# Altium PCB PCB1.PcbDoc
Units mil, origin at the board's own origin, x right, y up, seen from the top; angles counter-clockwise.
Board outline 6000 x 4000 mil, 2 copper layers (Top Layer, Bottom Layer); 13 components, 43 nets, 132 pads, 23 vias.
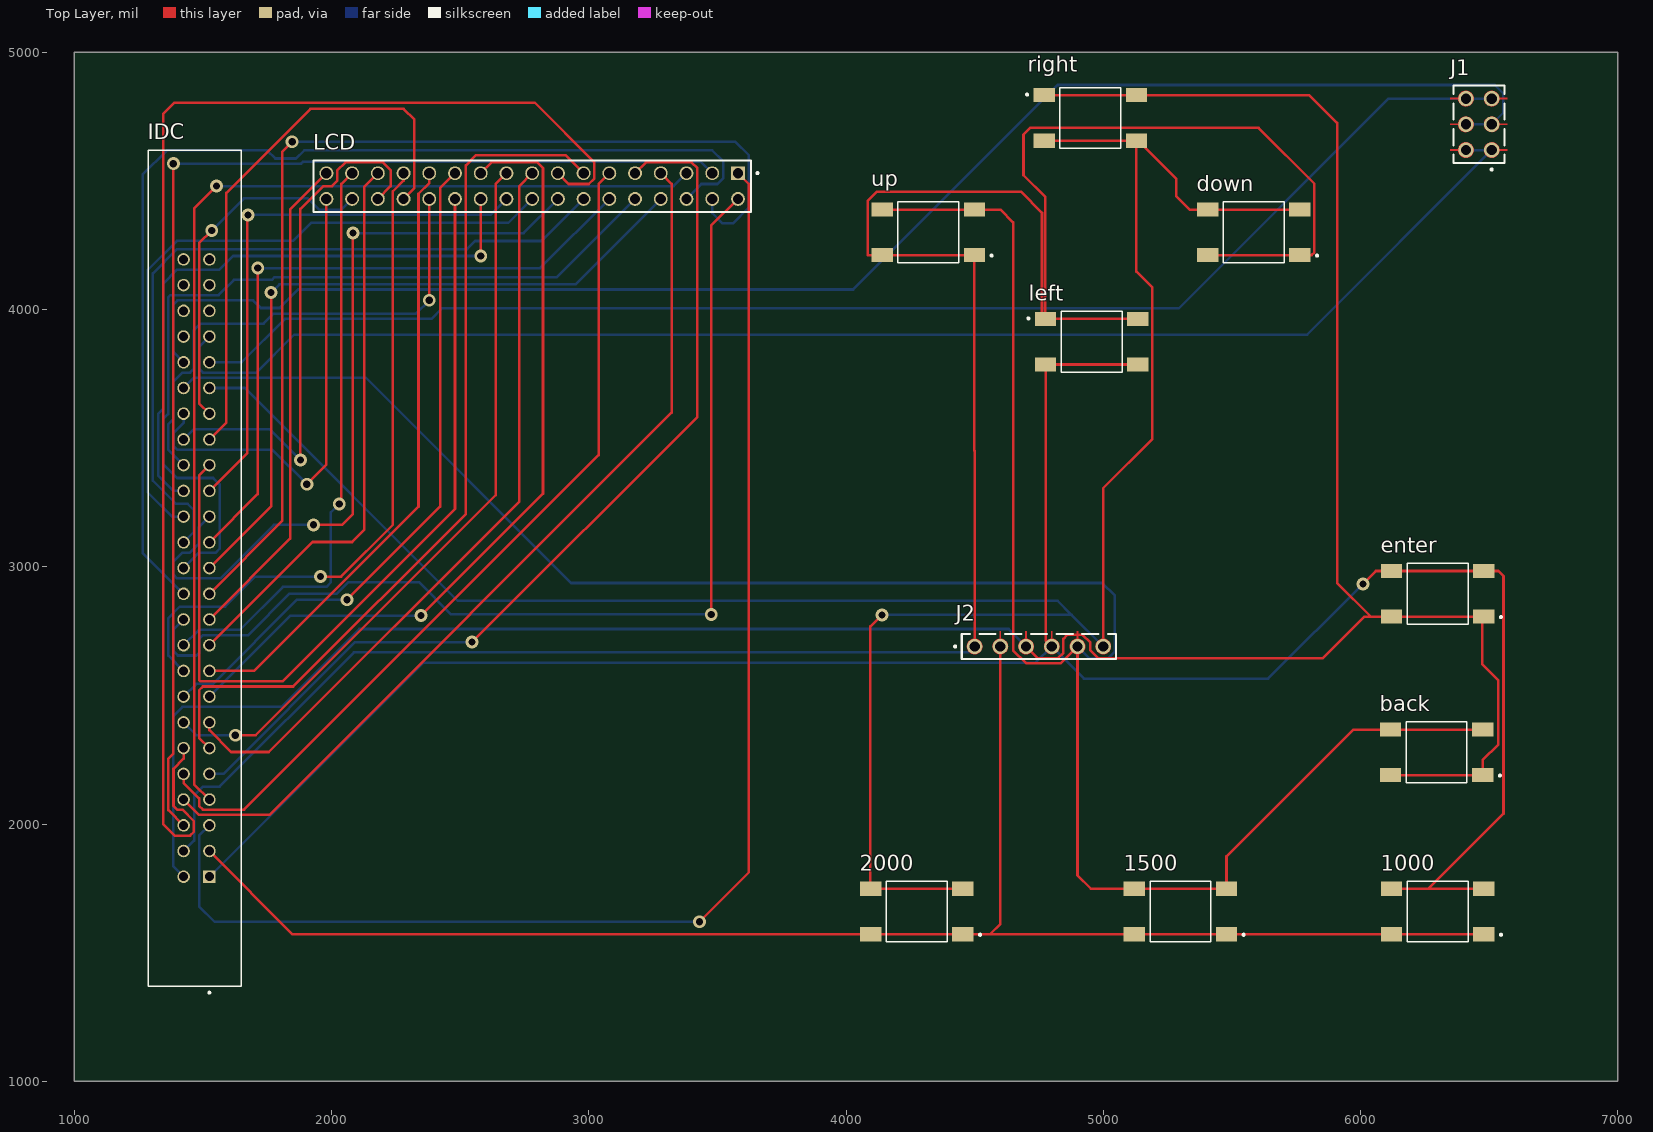
[diagram p0: Top Layer view]
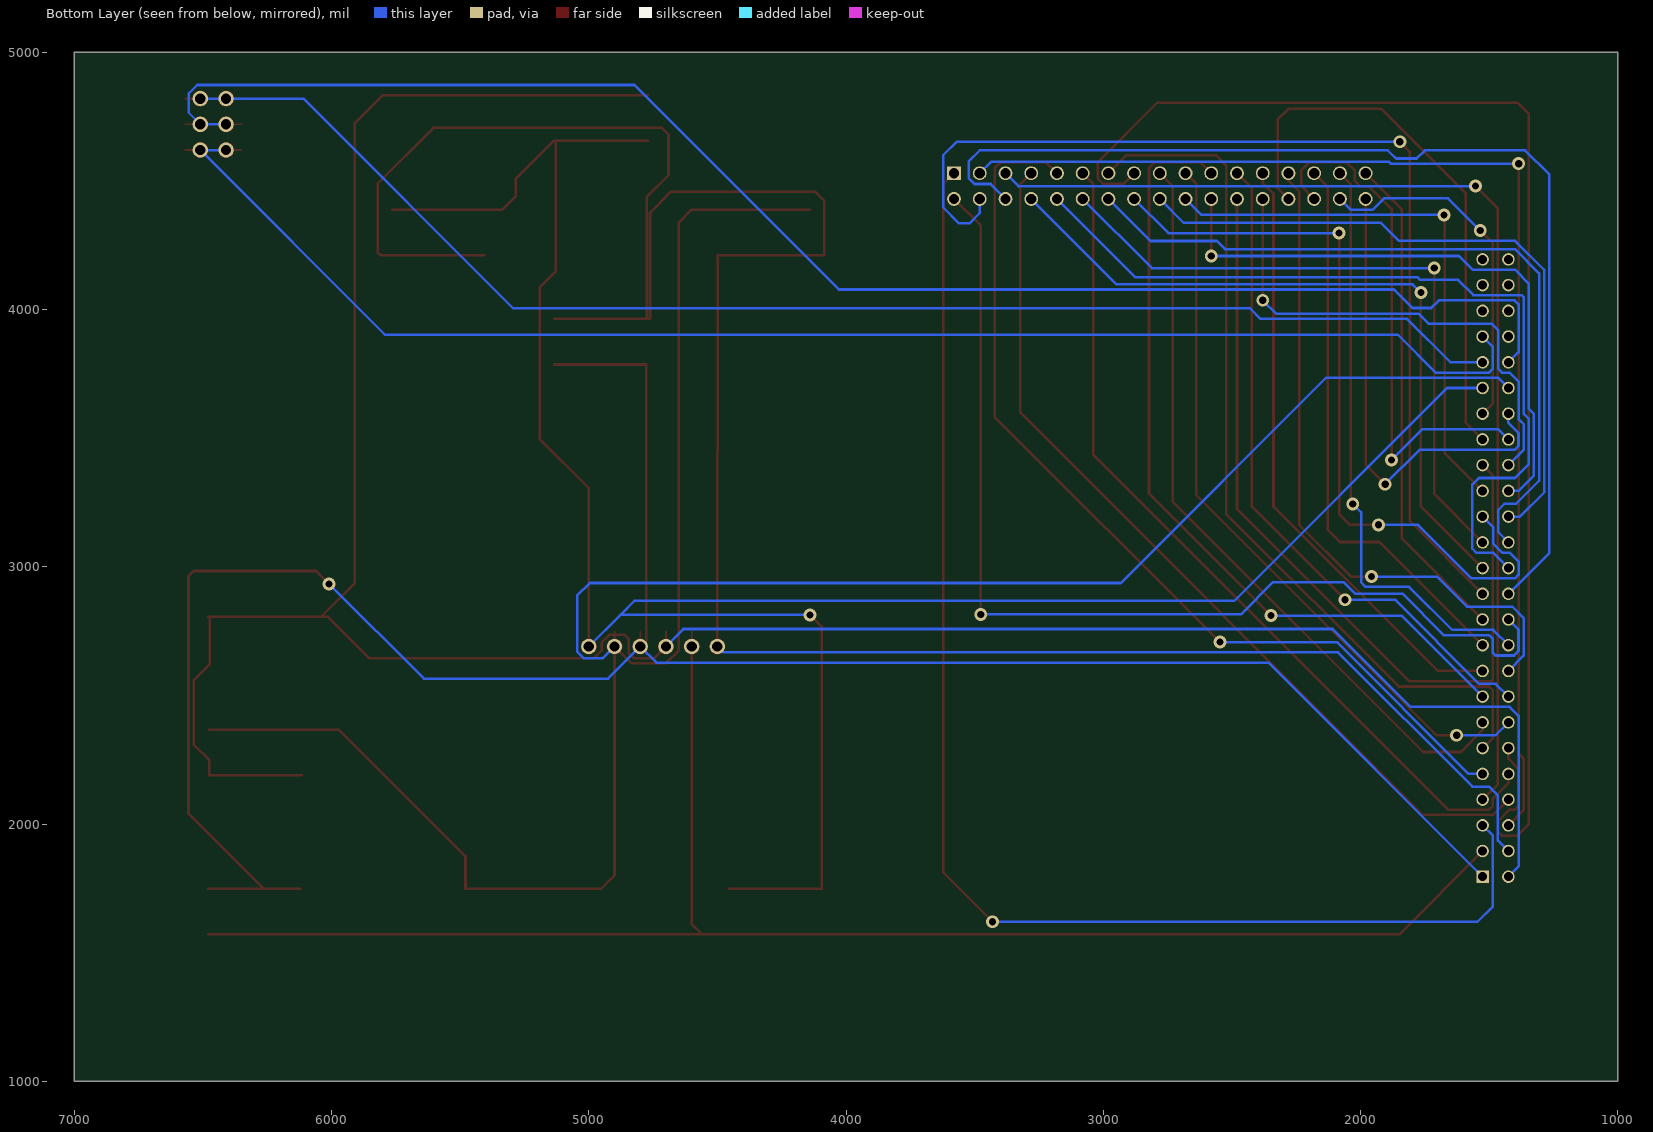
[diagram p1: Bottom Layer view, seen from below]
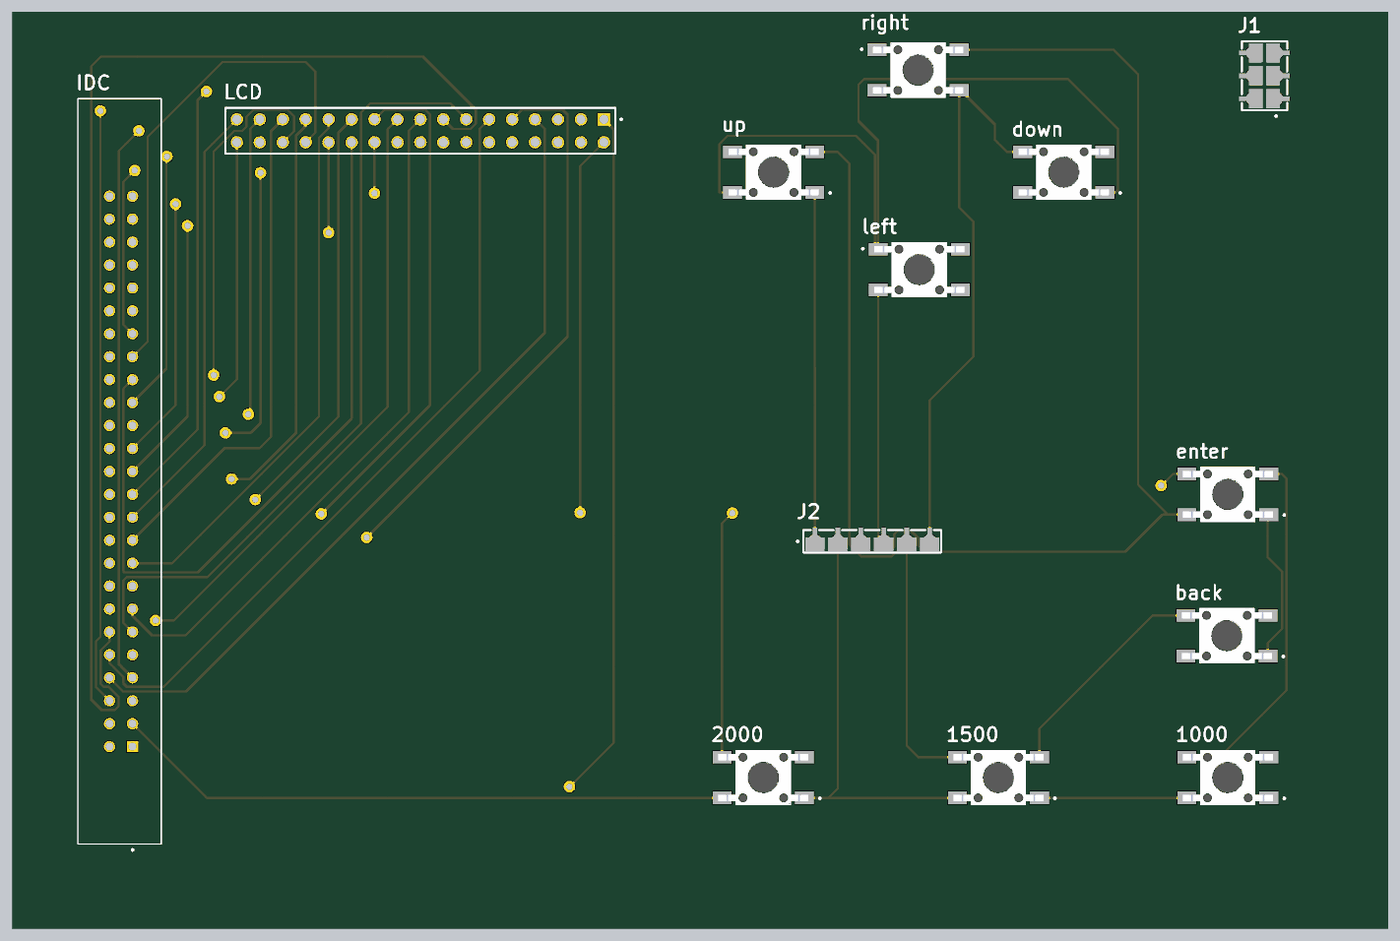
[diagram p2: 3D render of the assembled board from above, using the file's embedded part models]

## Layer stack, top to bottom
Top Solder: solder mask 0.4, Solder Resist, Dk 3.5
Top Layer: signal copper 1.4
Dielectric 1: dielectric 12.6, FR-4, Dk 4.8
Bottom Layer: signal copper 1.4
Bottom Solder: solder mask 0.4, Solder Resist, Dk 3.5

## Board outline
1000,1000 7000,1000 7000,5000 1000,5000

## Design rules (kind name [scope] priority, off if disabled: settings)
AssemblyTestPointUsage [All] p1: isadvanced=TRUE
AssemblyTestpoint [All] p1: isadvanced=TRUE testpointundercomponent=TRUE minsize=40 maxsize=100 preferedsize=60 minholesize=0 maxholesize=40 preferedholesize=32 testpointgrid=1 usegrid=TRUE gridtolerance=0.01 allowsidetop=TRUE allowsidebottom=TRUE
Clearance Clearance_1 [OnMid vs OnMid] p1: gap=10 ignorepadtopadclearanceinfootprint=FALSE sourcerule=36 cellrowname=All cellrowtype=0 cellcolname=All cellcoltype=0 innerlayers=TRUE
Clearance Clearance_2 [(ExistsOnLayer('Top Layer') Or ExistsOnLayer('Bottom Layer')) vs (ExistsOnLayer('Top Layer') Or ExistsOnLayer('Bottom Layer'))] p2: gap=10 ignorepadtopadclearanceinfootprint=FALSE sourcerule=36 cellrowname=All cellrowtype=0 cellcolname=All cellcoltype=0 outerlayers=TRUE
Clearance [All] p3: gap=10 ignorepadtopadclearanceinfootprint=FALSE ismatrix=TRUE
ComponentClearance [All] p1: isadvanced=TRUE gap=10 collisioncheckmode=3 verticalgap=10 showdistances=FALSE
FabricationTestPointUsage [All] p1: isadvanced=TRUE valid=0 allowmultiple=FALSE
FabricationTestpoint [All] p1: isadvanced=TRUE side=3 testpointundercomponent=TRUE minsize=40 maxsize=100 preferedsize=60 minholesize=0 maxholesize=40 preferedholesize=32 testpointgrid=1 allowsidetop=TRUE allowsidebottom=TRUE usegrid=TRUE gridtolerance=0.01
FanoutControl Fanout_BGA [IsBGA] p1: isadvanced=TRUE bgadir=Out bgaviamode=Centered fanoutstyle=Auto fanoutdirection=Alternating viagrid=1 // Fanout_BGA (Default Rule)
FanoutControl Fanout_LCC [IsLCC] p2: isadvanced=TRUE bgadir=Out bgaviamode=Centered fanoutstyle=Auto fanoutdirection=Alternating viagrid=1 // Fanout_LCC (Default Rule)
FanoutControl Fanout_SOIC [IsSOIC] p3: isadvanced=TRUE bgadir=Out bgaviamode=Centered fanoutstyle=Auto fanoutdirection=Alternating viagrid=1 // Fanout_SOIC (Default Rule)
FanoutControl Fanout_Small [(CompPinCount < 5)] p4: isadvanced=TRUE bgadir=Out bgaviamode=Centered fanoutstyle=Auto fanoutdirection=OutThenIn viagrid=1 // Fanout_Small (Default Rule)
FanoutControl Fanout_Default [All] p5: isadvanced=TRUE bgadir=Out bgaviamode=Centered fanoutstyle=Auto fanoutdirection=Alternating viagrid=1 // Fanout_Default (Default Rule)
Height [All] p1: isadvanced=TRUE minheight=0 maxheight=1000 prefheight=500
HoleSize [All] p1: isadvanced=TRUE absolutevalues=TRUE maxlimit=100 minlimit=1 maxpercent=80.000 minpercent=20.000
HoleToHoleClearance [All] p1: isadvanced=TRUE gap=10 allowstackedmicrovias=TRUE
LayerPairs [All] p1: isadvanced=TRUE enforce=TRUE
MinimumSolderMaskSliver [All] p1: isadvanced=TRUE minsoldermaskwidth=10
NetAntennae [All] p1: isadvanced=TRUE netantennaetolerance=0
PasteMaskExpansion [All] p1: isadvanced=TRUE expansion=0
PlaneClearance [All] p1: isadvanced=TRUE clearance=20
PlaneConnect [All] p1: isadvanced=TRUE planeconnectstyle=Relief reliefexpansion=20 reliefentries=4 reliefconductorwidth=10 reliefairgap=10
PolygonConnect [All] p1: connectstyle=Relief reliefconductorwidth=10 reliefentries=4 polygonreliefangle="90 Angle" airgapwidth=10
RoutingCorners [All] p1: isadvanced=TRUE cornerstyle=45-Degree minsetback=100 maxsetback=100
RoutingPriority [All] p1: isadvanced=TRUE routingpriority=0
RoutingVias [All] p1: holewidth=28 width=50 viastyle="Through Hole" minholewidth=28 minwidth=50 maxholewidth=28 maxwidth=50
ShortCircuit [All] p1: isadvanced=TRUE allowed=FALSE
SilkToSilkClearance [All] p1: isadvanced=TRUE silktosilkclearance=10
SilkToSolderMaskClearance [IsPad] p1: isadvanced=TRUE minsilkscreentomaskgap=10 clearancetoexposedcopper=TRUE
SolderMaskExpansion [All] p1: isadvanced=TRUE expansion=4 istentingtop=FALSE
UnRoutedNet [All] p1: isadvanced=TRUE
UnpouredPolygon [All] p1: isadvanced=TRUE
Width [All] p1: maxlimit=10 minlimit=10 preferedwidth=10
4 further rules are at their usual default settings.

## Classes and differential pairs
component class Sheet3: 1000 1500 2000 back down enter IDC J1 LCD left right up
component class Sheet2: zk
component class Sheet1: *

## Components (designator, comment, footprint, x,y, rotation, side; value= is the part's Value field where it differs from the comment)
1000 "4-1437565-9" SW_4-1437565-9 6300,1660 r180 top
1500 "4-1437565-9" SW_4-1437565-9 5300,1660 r180 top
2000 "4-1437565-9" SW_4-1437565-9 4275,1660 r180 top
back "4-1437565-9" SW_4-1437565-9 6295.87,2278.58 r180 top
down "4-1437565-9" SW_4-1437565-9 5585,4300 r180 top
enter "4-1437565-9" SW_4-1437565-9 6300,2895 r180 top
IDC "1-1761686-5" TE_1-1761686-5 1525,1795 r90 top
J1 "MTLW-103-07-L-D-320" SAMTEC_MTLW-103-07-L-D-320 6460,4720 r90 top (schematic designator J?)
J2 "MTLW-106-05-T-S-137" SAMTEC_MTLW-106-05-T-S-137 4750,2690 r180 top (schematic designator J?)
LCD "TSW-117-23-G-D" SAMTEC_TSW-117-23-G-D 3580,4530 r180 top
left "4-1437565-9" SW_4-1437565-9 4955,3875 r0 top
right "4-1437565-9" SW_4-1437565-9 4950,4745 r0 top
up "4-1437565-9" SW_4-1437565-9 4320,4300 r180 top

## Footprints (in the part's own frame and the unit in brackets; to place one, negate y for a bottom-side part, rotate by r counter-clockwise, add the part's x,y. Pads: shape width x height; smd on the part's side, far side on the other; paste and mask are expansions set on the pad)
SAMTEC_MTLW-103-07-L-D-320 [mm]
  round 1.52 hole 1.02: 01(-2.54,-1.27) 02(-2.54,1.27) 03(0,-1.27) 04(0,1.27) 05(2.54,-1.27) 06(2.54,1.27)
  Top Layer region: -2.461,-0.514 -2.382,-0.527 -2.305,-0.547 -2.231,-0.576 -2.16,-0.612 -2.093,-0.655 -2.031,-0.705 -1.975,-0.761 -1.925,-0.823 -1.882,-0.89 -1.846,-0.961 -1.817,-1.035 -1.797,-1.112 -1.784,-1.191 -1.78,-1.27 -1.781,-1.308 -1.784,-1.346 -1.788,-1.383 -1.795,-1.421 -1.803,-1.457 -1.813,-1.494 -1.825,-1.529 -1.839,-1.564 -1.854,-1.599 -1.871,-1.633 -1.89,-1.665 -1.91,-1.697 -1.932,-1.728 -1.955,-1.757 -1.98,-1.786 -2.006,-1.813 -2.034,-1.839 -2.063,-1.863 -2.092,-1.886 -2.123,-1.908 -2.155,-1.928 -2.188,-1.946 -2.222,-1.962 -2.257,-1.977 -2.292,-1.991 -2.328,-2.002 -2.364,-2.012 -2.401,-2.02 -2.438,-2.026 -2.475,-2.03 -2.475,-2.8 -2.605,-2.8 -2.605,-2.03 -2.642,-2.026 -2.679,-2.02 -2.716,-2.012 -2.752,-2.002 -2.788,-1.991 -2.823,-1.977 -2.858,-1.962 -2.892,-1.946 -2.925,-1.928 -2.957,-1.908 -2.988,-1.886 -3.017,-1.863 -3.046,-1.839 -3.074,-1.813 -3.1,-1.786 -3.125,-1.757 -3.148,-1.728 -3.17,-1.697 -3.19,-1.665 -3.209,-1.633 -3.226,-1.599 -3.241,-1.564 -3.255,-1.529 -3.267,-1.494 -3.277,-1.457 -3.285,-1.421 -3.292,-1.383 -3.296,-1.346 -3.299,-1.308 -3.3,-1.27 -3.296,-1.191 -3.283,-1.112 -3.263,-1.035 -3.234,-0.961 -3.198,-0.89 -3.155,-0.823 -3.105,-0.761 -3.049,-0.705 -2.987,-0.655 -2.92,-0.612 -2.849,-0.576 -2.775,-0.547 -2.698,-0.527 -2.619,-0.514 -2.54,-0.51
  Top Layer region: -2.475,2.03 -2.446,2.027 -2.412,2.022 -2.377,2.016 -2.343,2.008 -2.31,1.998 -2.277,1.987 -2.244,1.975 -2.212,1.961 -2.181,1.945 -2.15,1.928 -2.12,1.91 -2.091,1.89 -2.064,1.869 -2.037,1.847 -2.011,1.823 -1.986,1.799 -1.962,1.773 -1.94,1.746 -1.919,1.718 -1.899,1.69 -1.88,1.66 -1.863,1.63 -1.847,1.598 -1.833,1.566 -1.82,1.534 -1.809,1.501 -1.799,1.467 -1.791,1.433 -1.784,1.399 -1.78,1.37 -1.78,1.27 -1.781,1.23 -1.784,1.191 -1.789,1.151 -1.797,1.112 -1.806,1.073 -1.817,1.035 -1.83,0.998 -1.846,0.961 -1.863,0.925 -1.882,0.89 -1.903,0.856 -1.925,0.823 -1.949,0.792 -1.975,0.761 -2.003,0.733 -2.031,0.705 -2.062,0.679 -2.093,0.655 -2.126,0.633 -2.16,0.612 -2.195,0.593 -2.231,0.576 -2.268,0.56 -2.305,0.547 -2.343,0.536 -2.382,0.527 -2.421,0.519 -2.461,0.514 -2.5,0.511 -2.54,0.51 -2.58,0.511 -2.619,0.514 -2.659,0.519 -2.698,0.527 -2.737,0.536 -2.775,0.547 -2.812,0.56 -2.849,0.576 -2.885,0.593 -2.92,0.612 -2.954,0.633 -2.987,0.655 -3.018,0.679 -3.049,0.705 -3.077,0.733 -3.105,0.761 -3.131,0.792 -3.155,0.823 -3.177,0.856 -3.198,0.89 -3.217,0.925 -3.234,0.961 -3.25,0.998 -3.263,1.035 -3.274,1.073 -3.283,1.112 -3.291,1.151 -3.296,1.191 -3.299,1.23 -3.3,1.27 -3.3,1.37 -3.296,1.399 -3.289,1.433 -3.281,1.467 -3.271,1.501 -3.26,1.534 -3.247,1.566 -3.233,1.598 -3.217,1.63 -3.2,1.66 -3.181,1.69 -3.161,1.718 -3.14,1.746 -3.118,1.773 -3.094,1.799 -3.069,1.823 -3.043,1.847 -3.016,1.869 -2.989,1.89 -2.96,1.91 -2.93,1.928 -2.899,1.945 -2.868,1.961 -2.836,1.975 -2.803,1.987 -2.77,1.998 -2.737,2.008 -2.703,2.016 -2.668,2.022 -2.634,2.027 -2.605,2.03 -2.605,2.8 -2.475,2.8
  Top Layer region: 0.079,-0.514 0.158,-0.527 0.235,-0.547 0.309,-0.576 0.38,-0.612 0.447,-0.655 0.509,-0.705 0.565,-0.761 0.615,-0.823 0.658,-0.89 0.694,-0.961 0.723,-1.035 0.743,-1.112 0.756,-1.191 0.76,-1.27 0.759,-1.308 0.756,-1.346 0.752,-1.383 0.745,-1.421 0.737,-1.457 0.727,-1.494 0.715,-1.529 0.701,-1.564 0.686,-1.599 0.669,-1.633 0.65,-1.665 0.63,-1.697 0.608,-1.728 0.585,-1.757 0.56,-1.786 0.534,-1.813 0.506,-1.839 0.477,-1.863 0.448,-1.886 0.417,-1.908 0.385,-1.928 0.352,-1.946 0.318,-1.962 0.283,-1.977 0.248,-1.991 0.212,-2.002 0.176,-2.012 0.139,-2.02 0.102,-2.026 0.065,-2.03 0.065,-2.8 -0.065,-2.8 -0.065,-2.03 -0.102,-2.026 -0.139,-2.02 -0.176,-2.012 -0.212,-2.002 -0.248,-1.991 -0.283,-1.977 -0.318,-1.962 -0.352,-1.946 -0.385,-1.928 -0.417,-1.908 -0.448,-1.886 -0.477,-1.863 -0.506,-1.839 -0.534,-1.813 -0.56,-1.786 -0.585,-1.757 -0.608,-1.728 -0.63,-1.697 -0.65,-1.665 -0.669,-1.633 -0.686,-1.599 -0.701,-1.564 -0.715,-1.529 -0.727,-1.494 -0.737,-1.457 -0.745,-1.421 -0.752,-1.383 -0.756,-1.346 -0.759,-1.308 -0.76,-1.27 -0.756,-1.191 -0.743,-1.112 -0.723,-1.035 -0.694,-0.961 -0.658,-0.89 -0.615,-0.823 -0.565,-0.761 -0.509,-0.705 -0.447,-0.655 -0.38,-0.612 -0.309,-0.576 -0.235,-0.547 -0.158,-0.527 -0.079,-0.514 0,-0.51
  Top Layer region: 0.065,2.03 0.094,2.027 0.128,2.022 0.163,2.016 0.197,2.008 0.23,1.998 0.263,1.987 0.296,1.975 0.328,1.961 0.359,1.945 0.39,1.928 0.42,1.91 0.449,1.89 0.476,1.869 0.503,1.847 0.529,1.823 0.554,1.799 0.578,1.773 0.6,1.746 0.621,1.718 0.641,1.69 0.66,1.66 0.677,1.63 0.693,1.598 0.707,1.566 0.72,1.534 0.731,1.501 0.741,1.467 0.749,1.433 0.756,1.399 0.76,1.37 0.76,1.27 0.759,1.23 0.756,1.191 0.751,1.151 0.743,1.112 0.734,1.073 0.723,1.035 0.71,0.998 0.694,0.961 0.677,0.925 0.658,0.89 0.637,0.856 0.615,0.823 0.591,0.792 0.565,0.761 0.537,0.733 0.509,0.705 0.478,0.679 0.447,0.655 0.414,0.633 0.38,0.612 0.345,0.593 0.309,0.576 0.272,0.56 0.235,0.547 0.197,0.536 0.158,0.527 0.119,0.519 0.079,0.514 0.04,0.511 0,0.51 -0.04,0.511 -0.079,0.514 -0.119,0.519 -0.158,0.527 -0.197,0.536 -0.235,0.547 -0.272,0.56 -0.309,0.576 -0.345,0.593 -0.38,0.612 -0.414,0.633 -0.447,0.655 -0.478,0.679 -0.509,0.705 -0.537,0.733 -0.565,0.761 -0.591,0.792 -0.615,0.823 -0.637,0.856 -0.658,0.89 -0.677,0.925 -0.694,0.961 -0.71,0.998 -0.723,1.035 -0.734,1.073 -0.743,1.112 -0.751,1.151 -0.756,1.191 -0.759,1.23 -0.76,1.27 -0.76,1.37 -0.756,1.399 -0.749,1.433 -0.741,1.467 -0.731,1.501 -0.72,1.534 -0.707,1.566 -0.693,1.598 -0.677,1.63 -0.66,1.66 -0.641,1.69 -0.621,1.718 -0.6,1.746 -0.578,1.773 -0.554,1.799 -0.529,1.823 -0.503,1.847 -0.476,1.869 -0.449,1.89 -0.42,1.91 -0.39,1.928 -0.359,1.945 -0.328,1.961 -0.296,1.975 -0.263,1.987 -0.23,1.998 -0.197,2.008 -0.163,2.016 -0.128,2.022 -0.094,2.027 -0.065,2.03 -0.065,2.8 0.065,2.8
  Top Layer region: 2.619,-0.514 2.698,-0.527 2.775,-0.547 2.849,-0.576 2.92,-0.612 2.987,-0.655 3.049,-0.705 3.105,-0.761 3.155,-0.823 3.198,-0.89 3.234,-0.961 3.263,-1.035 3.283,-1.112 3.296,-1.191 3.3,-1.27 3.299,-1.308 3.296,-1.346 3.292,-1.383 3.285,-1.421 3.277,-1.457 3.267,-1.494 3.255,-1.529 3.241,-1.564 3.226,-1.599 3.209,-1.633 3.19,-1.665 3.17,-1.697 3.148,-1.728 3.125,-1.757 3.1,-1.786 3.074,-1.813 3.046,-1.839 3.017,-1.863 2.988,-1.886 2.957,-1.908 2.925,-1.928 2.892,-1.946 2.858,-1.962 2.823,-1.977 2.788,-1.991 2.752,-2.002 2.716,-2.012 2.679,-2.02 2.642,-2.026 2.605,-2.03 2.605,-2.8 2.475,-2.8 2.475,-2.03 2.438,-2.026 2.401,-2.02 2.364,-2.012 2.328,-2.002 2.292,-1.991 2.257,-1.977 2.222,-1.962 2.188,-1.946 2.155,-1.928 2.123,-1.908 2.092,-1.886 2.063,-1.863 2.034,-1.839 2.006,-1.813 1.98,-1.786 1.955,-1.757 1.932,-1.728 1.91,-1.697 1.89,-1.665 1.871,-1.633 1.854,-1.599 1.839,-1.564 1.825,-1.529 1.813,-1.494 1.803,-1.457 1.795,-1.421 1.788,-1.383 1.784,-1.346 1.781,-1.308 1.78,-1.27 1.784,-1.191 1.797,-1.112 1.817,-1.035 1.846,-0.961 1.882,-0.89 1.925,-0.823 1.975,-0.761 2.031,-0.705 2.093,-0.655 2.16,-0.612 2.231,-0.576 2.305,-0.547 2.382,-0.527 2.461,-0.514 2.54,-0.51
  Top Layer region: 2.605,2.03 2.634,2.027 2.668,2.022 2.703,2.016 2.737,2.008 2.77,1.998 2.803,1.987 2.836,1.975 2.868,1.961 2.899,1.945 2.93,1.928 2.96,1.91 2.989,1.89 3.016,1.869 3.043,1.847 3.069,1.823 3.094,1.799 3.118,1.773 3.14,1.746 3.161,1.718 3.181,1.69 3.2,1.66 3.217,1.63 3.233,1.598 3.247,1.566 3.26,1.534 3.271,1.501 3.281,1.467 3.289,1.433 3.296,1.399 3.3,1.37 3.3,1.27 3.299,1.23 3.296,1.191 3.291,1.151 3.283,1.112 3.274,1.073 3.263,1.035 3.25,0.998 3.234,0.961 3.217,0.925 3.198,0.89 3.177,0.856 3.155,0.823 3.131,0.792 3.105,0.761 3.077,0.733 3.049,0.705 3.018,0.679 2.987,0.655 2.954,0.633 2.92,0.612 2.885,0.593 2.849,0.576 2.812,0.56 2.775,0.547 2.737,0.536 2.698,0.527 2.659,0.519 2.619,0.514 2.58,0.511 2.54,0.51 2.5,0.511 2.461,0.514 2.421,0.519 2.382,0.527 2.343,0.536 2.305,0.547 2.268,0.56 2.231,0.576 2.195,0.593 2.16,0.612 2.126,0.633 2.093,0.655 2.062,0.679 2.031,0.705 2.003,0.733 1.975,0.761 1.949,0.792 1.925,0.823 1.903,0.856 1.882,0.89 1.863,0.925 1.846,0.961 1.83,0.998 1.817,1.035 1.806,1.073 1.797,1.112 1.789,1.151 1.784,1.191 1.781,1.23 1.78,1.27 1.78,1.37 1.784,1.399 1.791,1.433 1.799,1.467 1.809,1.501 1.82,1.534 1.833,1.566 1.847,1.598 1.863,1.63 1.88,1.66 1.899,1.69 1.919,1.718 1.94,1.746 1.962,1.773 1.986,1.799 2.011,1.823 2.037,1.847 2.064,1.869 2.091,1.89 2.12,1.91 2.15,1.928 2.181,1.945 2.212,1.961 2.244,1.975 2.277,1.987 2.31,1.998 2.343,2.008 2.377,2.016 2.412,2.022 2.446,2.027 2.475,2.03 2.475,2.8 2.605,2.8
  silkscreen extent -4.56,-2.52 3.81,2.52
SAMTEC_MTLW-106-05-T-S-137 [mm]
  round 1.52 hole 1.02: 01(6.35,0) 02(3.81,0) 03(1.27,0) 04(-1.27,0) 05(-3.81,0) 06(-6.35,0)
  Top Layer region: 6.429,0.756 6.508,0.743 6.585,0.723 6.659,0.694 6.73,0.658 6.797,0.615 6.859,0.565 6.915,0.509 6.965,0.447 7.008,0.38 7.044,0.309 7.073,0.235 7.093,0.158 7.106,0.079 7.11,0 7.109,-0.038 7.106,-0.076 7.102,-0.113 7.095,-0.151 7.087,-0.187 7.077,-0.224 7.065,-0.259 7.051,-0.294 7.036,-0.329 7.019,-0.363 7,-0.395 6.98,-0.427 6.958,-0.458 6.935,-0.487 6.91,-0.516 6.884,-0.543 6.856,-0.569 6.827,-0.593 6.798,-0.616 6.767,-0.638 6.735,-0.658 6.702,-0.676 6.668,-0.692 6.633,-0.707 6.598,-0.721 6.562,-0.732 6.526,-0.742 6.489,-0.75 6.452,-0.756 6.415,-0.76 6.415,-1.53 6.285,-1.53 6.285,-0.76 6.248,-0.756 6.211,-0.75 6.174,-0.742 6.138,-0.732 6.102,-0.721 6.067,-0.707 6.032,-0.692 5.998,-0.676 5.965,-0.658 5.933,-0.638 5.902,-0.616 5.873,-0.593 5.844,-0.569 5.816,-0.543 5.79,-0.516 5.765,-0.487 5.742,-0.458 5.72,-0.427 5.7,-0.395 5.681,-0.363 5.664,-0.329 5.649,-0.294 5.635,-0.259 5.623,-0.224 5.613,-0.187 5.605,-0.151 5.598,-0.113 5.594,-0.076 5.591,-0.038 5.59,0 5.594,0.079 5.607,0.158 5.627,0.235 5.656,0.309 5.692,0.38 5.735,0.447 5.785,0.509 5.841,0.565 5.903,0.615 5.97,0.658 6.041,0.694 6.115,0.723 6.192,0.743 6.271,0.756 6.35,0.76
  Top Layer region: 3.889,0.756 3.968,0.743 4.045,0.723 4.119,0.694 4.19,0.658 4.257,0.615 4.319,0.565 4.375,0.509 4.425,0.447 4.468,0.38 4.504,0.309 4.533,0.235 4.553,0.158 4.566,0.079 4.57,0 4.569,-0.038 4.566,-0.076 4.562,-0.113 4.555,-0.151 4.547,-0.187 4.537,-0.224 4.525,-0.259 4.511,-0.294 4.496,-0.329 4.479,-0.363 4.46,-0.395 4.44,-0.427 4.418,-0.458 4.395,-0.487 4.37,-0.516 4.344,-0.543 4.316,-0.569 4.287,-0.593 4.258,-0.616 4.227,-0.638 4.195,-0.658 4.162,-0.676 4.128,-0.692 4.093,-0.707 4.058,-0.721 4.022,-0.732 3.986,-0.742 3.949,-0.75 3.912,-0.756 3.875,-0.76 3.875,-1.53 3.745,-1.53 3.745,-0.76 3.708,-0.756 3.671,-0.75 3.634,-0.742 3.598,-0.732 3.562,-0.721 3.527,-0.707 3.492,-0.692 3.458,-0.676 3.425,-0.658 3.393,-0.638 3.362,-0.616 3.333,-0.593 3.304,-0.569 3.276,-0.543 3.25,-0.516 3.225,-0.487 3.202,-0.458 3.18,-0.427 3.16,-0.395 3.141,-0.363 3.124,-0.329 3.109,-0.294 3.095,-0.259 3.083,-0.224 3.073,-0.187 3.065,-0.151 3.058,-0.113 3.054,-0.076 3.051,-0.038 3.05,0 3.054,0.079 3.067,0.158 3.087,0.235 3.116,0.309 3.152,0.38 3.195,0.447 3.245,0.509 3.301,0.565 3.363,0.615 3.43,0.658 3.501,0.694 3.575,0.723 3.652,0.743 3.731,0.756 3.81,0.76
  Top Layer region: 1.349,0.756 1.428,0.743 1.505,0.723 1.579,0.694 1.65,0.658 1.717,0.615 1.779,0.565 1.835,0.509 1.885,0.447 1.928,0.38 1.964,0.309 1.993,0.235 2.013,0.158 2.026,0.079 2.03,0 2.029,-0.038 2.026,-0.076 2.022,-0.113 2.015,-0.151 2.007,-0.187 1.997,-0.224 1.985,-0.259 1.971,-0.294 1.956,-0.329 1.939,-0.363 1.92,-0.395 1.9,-0.427 1.878,-0.458 1.855,-0.487 1.83,-0.516 1.804,-0.543 1.776,-0.569 1.747,-0.593 1.718,-0.616 1.687,-0.638 1.655,-0.658 1.622,-0.676 1.588,-0.692 1.553,-0.707 1.518,-0.721 1.482,-0.732 1.446,-0.742 1.409,-0.75 1.372,-0.756 1.335,-0.76 1.335,-1.53 1.205,-1.53 1.205,-0.76 1.168,-0.756 1.131,-0.75 1.094,-0.742 1.058,-0.732 1.022,-0.721 0.987,-0.707 0.952,-0.692 0.918,-0.676 0.885,-0.658 0.853,-0.638 0.822,-0.616 0.793,-0.593 0.764,-0.569 0.736,-0.543 0.71,-0.516 0.685,-0.487 0.662,-0.458 0.64,-0.427 0.62,-0.395 0.601,-0.363 0.584,-0.329 0.569,-0.294 0.555,-0.259 0.543,-0.224 0.533,-0.187 0.525,-0.151 0.518,-0.113 0.514,-0.076 0.511,-0.038 0.51,0 0.514,0.079 0.527,0.158 0.547,0.235 0.576,0.309 0.612,0.38 0.655,0.447 0.705,0.509 0.761,0.565 0.823,0.615 0.89,0.658 0.961,0.694 1.035,0.723 1.112,0.743 1.191,0.756 1.27,0.76
  Top Layer region: -1.191,0.756 -1.112,0.743 -1.035,0.723 -0.961,0.694 -0.89,0.658 -0.823,0.615 -0.761,0.565 -0.705,0.509 -0.655,0.447 -0.612,0.38 -0.576,0.309 -0.547,0.235 -0.527,0.158 -0.514,0.079 -0.51,0 -0.511,-0.038 -0.514,-0.076 -0.518,-0.113 -0.525,-0.151 -0.533,-0.187 -0.543,-0.224 -0.555,-0.259 -0.569,-0.294 -0.584,-0.329 -0.601,-0.363 -0.62,-0.395 -0.64,-0.427 -0.662,-0.458 -0.685,-0.487 -0.71,-0.516 -0.736,-0.543 -0.764,-0.569 -0.793,-0.593 -0.822,-0.616 -0.853,-0.638 -0.885,-0.658 -0.918,-0.676 -0.952,-0.692 -0.987,-0.707 -1.022,-0.721 -1.058,-0.732 -1.094,-0.742 -1.131,-0.75 -1.168,-0.756 -1.205,-0.76 -1.205,-1.53 -1.335,-1.53 -1.335,-0.76 -1.372,-0.756 -1.409,-0.75 -1.446,-0.742 -1.482,-0.732 -1.518,-0.721 -1.553,-0.707 -1.588,-0.692 -1.622,-0.676 -1.655,-0.658 -1.687,-0.638 -1.718,-0.616 -1.747,-0.593 -1.776,-0.569 -1.804,-0.543 -1.83,-0.516 -1.855,-0.487 -1.878,-0.458 -1.9,-0.427 -1.92,-0.395 -1.939,-0.363 -1.956,-0.329 -1.971,-0.294 -1.985,-0.259 -1.997,-0.224 -2.007,-0.187 -2.015,-0.151 -2.022,-0.113 -2.026,-0.076 -2.029,-0.038 -2.03,0 -2.026,0.079 -2.013,0.158 -1.993,0.235 -1.964,0.309 -1.928,0.38 -1.885,0.447 -1.835,0.509 -1.779,0.565 -1.717,0.615 -1.65,0.658 -1.579,0.694 -1.505,0.723 -1.428,0.743 -1.349,0.756 -1.27,0.76
  Top Layer region: -3.731,0.756 -3.652,0.743 -3.575,0.723 -3.501,0.694 -3.43,0.658 -3.363,0.615 -3.301,0.565 -3.245,0.509 -3.195,0.447 -3.152,0.38 -3.116,0.309 -3.087,0.235 -3.067,0.158 -3.054,0.079 -3.05,0 -3.051,-0.038 -3.054,-0.076 -3.058,-0.113 -3.065,-0.151 -3.073,-0.187 -3.083,-0.224 -3.095,-0.259 -3.109,-0.294 -3.124,-0.329 -3.141,-0.363 -3.16,-0.395 -3.18,-0.427 -3.202,-0.458 -3.225,-0.487 -3.25,-0.516 -3.276,-0.543 -3.304,-0.569 -3.333,-0.593 -3.362,-0.616 -3.393,-0.638 -3.425,-0.658 -3.458,-0.676 -3.492,-0.692 -3.527,-0.707 -3.562,-0.721 -3.598,-0.732 -3.634,-0.742 -3.671,-0.75 -3.708,-0.756 -3.745,-0.76 -3.745,-1.53 -3.875,-1.53 -3.875,-0.76 -3.912,-0.756 -3.949,-0.75 -3.986,-0.742 -4.022,-0.732 -4.058,-0.721 -4.093,-0.707 -4.128,-0.692 -4.162,-0.676 -4.195,-0.658 -4.227,-0.638 -4.258,-0.616 -4.287,-0.593 -4.316,-0.569 -4.344,-0.543 -4.37,-0.516 -4.395,-0.487 -4.418,-0.458 -4.44,-0.427 -4.46,-0.395 -4.479,-0.363 -4.496,-0.329 -4.511,-0.294 -4.525,-0.259 -4.537,-0.224 -4.547,-0.187 -4.555,-0.151 -4.562,-0.113 -4.566,-0.076 -4.569,-0.038 -4.57,0 -4.566,0.079 -4.553,0.158 -4.533,0.235 -4.504,0.309 -4.468,0.38 -4.425,0.447 -4.375,0.509 -4.319,0.565 -4.257,0.615 -4.19,0.658 -4.119,0.694 -4.045,0.723 -3.968,0.743 -3.889,0.756 -3.81,0.76
  Top Layer region: -6.271,0.756 -6.192,0.743 -6.115,0.723 -6.041,0.694 -5.97,0.658 -5.903,0.615 -5.841,0.565 -5.785,0.509 -5.735,0.447 -5.692,0.38 -5.656,0.309 -5.627,0.235 -5.607,0.158 -5.594,0.079 -5.59,0 -5.591,-0.038 -5.594,-0.076 -5.598,-0.113 -5.605,-0.151 -5.613,-0.187 -5.623,-0.224 -5.635,-0.259 -5.649,-0.294 -5.664,-0.329 -5.681,-0.363 -5.7,-0.395 -5.72,-0.427 -5.742,-0.458 -5.765,-0.487 -5.79,-0.516 -5.816,-0.543 -5.844,-0.569 -5.873,-0.593 -5.902,-0.616 -5.933,-0.638 -5.965,-0.658 -5.998,-0.676 -6.032,-0.692 -6.067,-0.707 -6.102,-0.721 -6.138,-0.732 -6.174,-0.742 -6.211,-0.75 -6.248,-0.756 -6.285,-0.76 -6.285,-1.53 -6.415,-1.53 -6.415,-0.76 -6.452,-0.756 -6.489,-0.75 -6.526,-0.742 -6.562,-0.732 -6.598,-0.721 -6.633,-0.707 -6.668,-0.692 -6.702,-0.676 -6.735,-0.658 -6.767,-0.638 -6.798,-0.616 -6.827,-0.593 -6.856,-0.569 -6.884,-0.543 -6.91,-0.516 -6.935,-0.487 -6.958,-0.458 -6.98,-0.427 -7,-0.395 -7.019,-0.363 -7.036,-0.329 -7.051,-0.294 -7.065,-0.259 -7.077,-0.224 -7.087,-0.187 -7.095,-0.151 -7.102,-0.113 -7.106,-0.076 -7.109,-0.038 -7.11,0 -7.106,0.079 -7.093,0.158 -7.073,0.235 -7.044,0.309 -7.008,0.38 -6.965,0.447 -6.915,0.509 -6.859,0.565 -6.797,0.615 -6.73,0.658 -6.659,0.694 -6.585,0.723 -6.508,0.743 -6.429,0.756 -6.35,0.76
  silkscreen extent -7.62,-1.25 8.37,1.25
SAMTEC_TSW-117-23-G-D [mm]
  rect 1.37x1.37 hole 1.02: 01(0,0)
  round 1.37 hole 1.02: 02(0,2.54) 03(2.54,0) 04(2.54,2.54) 05(5.08,0) 06(5.08,2.54) 07(7.62,0) 08(7.62,2.54) 09(10.16,0) 10(10.16,2.54) 11(12.7,0) 12(12.7,2.54) 13(15.24,0) 14(15.24,2.54) 15(17.78,0) 16(17.78,2.54) 17(20.32,0) 18(20.32,2.54) 19(22.86,0) 20(22.86,2.54) 21(25.4,0) 22(25.4,2.54) 23(27.94,0) 24(27.94,2.54) 25(30.48,0) 26(30.48,2.54) 27(33.02,0) 28(33.02,2.54) 29(35.56,0) 30(35.56,2.54) 31(38.1,0) 32(38.1,2.54) 33(40.64,0) 34(40.64,2.54)
  silkscreen extent -2.02,-1.27 41.91,3.81
SW_4-1437565-9 [mm]
  rect 2.1x1.4 smd: 1(-4.55,2.25) 2(4.55,2.25) 3(-4.55,-2.25) 4(4.55,-2.25)
  silkscreen extent -6.35,-3 3,3, body extent -5,-3 5,3, height 7.26
TE_1-1761686-5 [mm]
  rect 1.24x1.24 hole 0.89: 1(0,0)
  round 1.24 hole 0.89: 2(0,2.54) 3(2.54,0) 4(2.54,2.54) 5(5.08,0) 6(5.08,2.54) 7(7.62,0) 8(7.62,2.54) 9(10.16,0) 10(10.16,2.54) 11(12.7,0) 12(12.7,2.54) 13(15.24,0) 14(15.24,2.54) 15(17.78,0) 16(17.78,2.54) 17(20.32,0) 18(20.32,2.54) 19(22.86,0) 20(22.86,2.54) 21(25.4,0) 22(25.4,2.54) 23(27.94,0) 24(27.94,2.54) 25(30.48,0) 26(30.48,2.54) 27(33.02,0) 28(33.02,2.54) 29(35.56,0) 30(35.56,2.54) 31(38.1,0) 32(38.1,2.54) 33(40.64,0) 34(40.64,2.54) 35(43.18,0) 36(43.18,2.54) 37(45.72,0) 38(45.72,2.54) 39(48.26,0) 40(48.26,2.54) 41(50.8,0) 42(50.8,2.54) 43(53.34,0) 44(53.34,2.54) 45(55.88,0) 46(55.88,2.54) 47(58.42,0) 48(58.42,2.54) 49(60.96,0) 50(60.96,2.54)
  silkscreen extent -11.54,-3.18 71.75,6.04

## Part data
1000 1500 2000 back down enter left right up: "Switch, Tactile, SPST-NO, .05A, 24V, Surface Mount, Off-Mom, FSMJSMA Series", Contact_Current_Rating="50 mA", Package=None, Check_prices=https://www.snapeda.com/parts/4-1437565-9/TE+Connectivity+ALCOSWITCH+Switches/view-part/?ref=eda, Configuration_Pole-Throw="Single Pole - Single Throw", EU_RoHS_Compliance=Compliant, MF="TE Connectivity", MP=4-1437565-9, SnapEDA_Link=https://www.snapeda.com/parts/4-1437565-9/TE+Connectivity+ALCOSWITCH+Switches/view-part/?ref=snap
IDC J1 J2 LCD: Package=None, Availability=Unavailable, Price=None
  IDC: MP=1-1761686-5
  J1: MP=MTLW-103-07-L-D-320
  J2: MP=MTLW-106-05-T-S-137
  LCD: MP=TSW-117-23-G-D

## Via types
v1: diameter 50, hole 28, Top Layer to Bottom Layer, 23 vias

## Nets (pads, with @x,y where several pads share a name; then routed paths per layer and width w, separated by ;. In a path a pad name is that pad's centre, name@x,y a point inside that pad or via, vN(x,y) a via of type N, cw(c..) or ccw(c..) an arc to the next point about the centre after c; other vN are vias at no path point)
Net1000_1: 1000.1 1000.2 1500.1 1500.2 2000.1 2000.2 IDC.3 J2.02 | length 6223.9
  Top Layer w10: IDC.3 1849,1571 4082,1571 4082,1571.42 2000.2 2000.1 4560,1571.42 ; J2.02 4600,1611.42 4560,1571.42 ; 1000.1 1000.2 1500.1 1500.2 4560,1571.42
Net1000_3: 1000.3 1000.4 enter.3 enter.4 IDC.1 J2.04 left.3 left.4 | length 8793.8
  Top Layer w10: J2.04 4775.87,2714.13 left.3 left.4 ; v1(6009.42,2933) 6060,2983.58 enter.4 6300,2983.58 enter.3 6536,2983.58 6556,2963.58 6556,2040 6264.58,1748.58 ; 1000.4 6264.58,1748.58 ; 1000.3 6264.58,1748.58
  Bottom Layer w10: IDC.1 2357,2627 4737,2627 J2.04 4925,2565 5641.42,2565 v1(6009.42,2933)
Net1500_3: 1500.3 1500.4 back.3 back.4 IDC.40 J2.05 up.3 up.4 | length 9686.5
  Top Layer w10: up.4 4320,4388.58 up.3 4600,4388.58 4650,4338.58 4650,2675 4699.92,2625.08 4835.08,2625.08 J2.05 4900,1800 4951.42,1748.58 1500.4 1500.3 5479.13,1874.13 5972.16,2367.16 back.4 back.3
  Bottom Layer w10: IDC.40 1465,3735 2133,3735 2931,2937 4996,2937 5045,2888 5045,2670 5020,2645 4945,2645 J2.05
Net2000_3: 2000.3 2000.4 down.3 down.4 IDC.39 J2.06 right.3 right.4 | length 9285.7
  Top Layer w10: v1(4140,2813) 4095,2768 4095,1748.58 2000.4 2000.3 ; right.3 right.4@5129,4656.42 ; J2.06 5000,3306 5191,3497 5191,4085 5129,4147 right.4@5129,4656.42 ; down.3 down.4 5335.84,4388.58 5284.42,4440 5284.42,4508 5136,4656.42 right.4 right.4@5129,4656.42
  Bottom Layer w10: IDC.39 1663,3695 2490.15,2867.85 4822.15,2867.85 4877,2813 ; v1(4140,2813) 4877,2813 ; J2.06 4877,2813
Netback_1: back.1 back.2 enter.1 enter.2 IDC.2 J2.03 right.1 right.2 | length 10295.7
  Top Layer w10: J2.03 4744.92,2645.08 4825,2645.08 4844.92,2665 4844.92,2720 4859.92,2735 4920,2735 4950,2705 4950,2675 4980,2645 5853.58,2645 6015,2806.42 6040,2806.42 ; right.1 right.2 5800.42,4833.58 5909,4725 5909,2937.42 6040,2806.42 ; back.2 back.1 6475,2248 6536,2309 6536,2558.13 6472.91,2621.22 enter.1@6472.91,2806.42 ; enter.1 enter.1@6472.91,2806.42 ; 6040,2806.42 enter.2 enter.1@6472.91,2806.42
  Bottom Layer w10: IDC.2 1385,1835 1385,2420 1420,2455 1804.99,2455 2107.99,2758 4632,2758 J2.03
Netdown_1: down.1 down.2 IDC.4 J2.01 left.1 left.2 up.1 up.2 | length 9835.3
  Top Layer w10: J2.01 4500,3450 4499.13,3450.87 up.1 up.2 4084,4211.42 4084,4422 4120,4458 4680,4458 4762,4376 4762,3963.58 left.1@4775,3963.58 ; left.2 left.1 left.1@4775,3963.58 ; down.2 down.1 5810,4211.42 5821,4222.42 5821,4489 5604,4706 4716,4706 4690,4680 4690,4522 4775,4437 left.1@4775,3963.58
  Bottom Layer w10: IDC.4 1465.59,1935.59 1465.59,2110.59 1500,2145 1565,2145 2087,2667 4477,2667 J2.01
NetIDC_5: IDC.5 LCD.01 | length 5307.5
  Top Layer w10: v1(3430,1620) 3622,1812 3622,4488 LCD.01
  Bottom Layer w10: IDC.5 1485.59,1955.59 1485.59,1680 1545.59,1620 v1(3430,1620)
NetIDC_6: IDC.6 LCD.03 | length 4720.8
  Top Layer w10: v1(1385,4567) 1385,2273.82 1365.59,2254.41 1365.59,2054.41 IDC.6
  Bottom Layer w10: v1(1385,4567) 1881.9,4567 1888.9,4574 3436,4574 LCD.03
NetIDC_7: IDC.7 LCD.05 | length 4293.5
  Top Layer w10: IDC.7 1465.59,2154.41 1465.59,4392.59 v1(1553,4480)
  Bottom Layer w10: v1(1553,4480) 3330,4480 LCD.05
NetIDC_8: IDC.8 LCD.07 | length 3517.4
  Top Layer w10: IDC.8 1484.41,2035.59 1758.32,2035.59 3322,3599.27 3322,4488 LCD.07
NetIDC_9: IDC.9 LCD.09 | length 3707.4
  Top Layer w10: v1(2546,2707) 3422,3583 3422,4550 3400,4572 3222,4572 LCD.09
  Bottom Layer w10: IDC.9 1580,2195 2092,2707 v1(2546,2707)
NetIDC_10: IDC.10 LCD.11 | length 3392.8
  Top Layer w10: IDC.10 1425,2160 1485.59,2099.41 1485.59,2070 1500,2055.59 1659.59,2055.59 3038,3434 3038,4488 LCD.11
NetIDC_11: IDC.11 LCD.13 | length 3419.7
  Top Layer w10: IDC.11 1485.59,2334.41 1485.59,2520 1500,2534.41 1850.9,2534.41 2522,3205.51 2522,4560 2562,4600 2910,4600 LCD.13
NetIDC_12: IDC.12 LCD.15 | length 5312.2
  Top Layer w10: IDC.12 1425,2254 1385.59,2214.59 1385.59,2070 1400,2055.59 1420.14,2055.59 1464.41,2011.32 1464.41,1969.41 1450,1955 1390,1955 1345,2000 1345,4760 1389,4804 2790,4804 3022,4572 3022,4510 3000,4488 2922,4488 LCD.15
NetIDC_13: IDC.13 LCD.17 | length 2970.4
  Top Layer w10: IDC.13 1525,2365 1610,2280 1756,2280 2730,3254 2730,4480 LCD.17
NetIDC_14: IDC.14 LCD.19 | length 2889.6
  Top Layer w10: v1(1626,2345) 1704.99,2345 2638,3278.01 2638,4488 LCD.19
  Bottom Layer w10: IDC.14 1475,2345 v1(1626,2345)
NetIDC_15: IDC.15 LCD.21 | length 3158.3
  Top Layer w10: v1(2348,2810) 2822,3284 2822,4550 2800,4572 2622,4572 LCD.21
  Bottom Layer w10: IDC.15 1840,2810 v1(2348,2810)
NetIDC_16: IDC.16 LCD.23 | length 2623.3
  Top Layer w10: v1(2060.32,2872) 2422,3233.68 2422,4472 LCD.23
  Bottom Layer w10: IDC.16 1475,2545 1539,2545 1866,2872 v1(2060.32,2872)
NetIDC_17: IDC.17 LCD.25 | length 2391.1
  Top Layer w10: IDC.17 1699,2595 2338.03,3234.03 2338.03,4450.03 2380,4492 LCD.25
NetIDC_18: IDC.18 LCD.27 | length 2637.1
  Top Layer w10: v1(1957,2962) 2037,2962 2238,3163 2238,4459 2280,4501 LCD.27
  Bottom Layer w10: IDC.18 1365.59,2654.41 1365.59,2800.59 1410,2845 1586,2845 1703,2962 v1(1957,2962)
NetIDC_19: IDC.19 LCD.29 | length 2196.3
  Top Layer w10: IDC.19 1926.31,3096.31 2080,3096.31 2128,3144.31 2128,4478 LCD.29
NetIDC_20: IDC.20 LCD.31 | length 2298.4
  Top Layer w10: v1(2030,3244) 2038,3252 2038,4488 LCD.31
  Bottom Layer w10: IDC.20 1484.41,2754.41 1643.23,2754.41 1810.82,2922 1980,2922 1997,2939 1997,3211 v1(2030,3244)
NetIDC_21: IDC.21 LCD.33 | length 1923.5
  Top Layer w10: IDC.21 1839,3109 1839,4389 LCD.33
NetIDC_22: IDC.22 LCD.02 | length 4096.3
  Top Layer w10: v1(3476,2815) 3476,4326 LCD.02
  Bottom Layer w10: IDC.22 1385.59,2755.59 1385.59,2672.41 1403,2655 1475,2655 1485.59,2665.59 1485.59,2720 1500,2734.41 1676.41,2734.41 1837.48,2895.48 2021,2895.48 2065.52,2940 2340,2940 2465,2815 v1(3476,2815)
NetIDC_23: IDC.23 LCD.04 | length 4129.2
  Top Layer w10: IDC.23 1809,3179 1809,4614 v1(1847,4652)
  Bottom Layer w10: v1(1847,4652) 3570,4652 3622,4600 3622,4397 3560,4335 3520,4335 3480,4375 LCD.04
NetIDC_24: IDC.24 LCD.06 | length 4277.2
  Bottom Layer w10: IDC.24 1265.59,3054.41 1265.59,4524.59 1360,4619 1749.9,4619 1781.9,4587 1861.9,4587 1893.9,4619 3480,4619 3522,4577 3522,4510 3500,4488 3438,4488 LCD.06
NetIDC_25: IDC.25 LCD.08 | length 2836.2
  Top Layer w10: IDC.25 1765,3235 v1(1765,4066)
  Bottom Layer w10: v1(1765,4066) 1797,4098 2948,4098 LCD.08
NetIDC_26: IDC.26 LCD.10 | length 3303
  Bottom Layer w10: IDC.26 1485,3055 1550,3055 1565,3070 1565,3320 1540,3345 1400,3345 1345.59,3399.41 1345.59,3574.41 1365,3593.82 1365,4047.59 1373,4055.59 1560.59,4055.59 1620,4115 1768,4115 1779,4126 2876,4126 LCD.10
NetIDC_27: IDC.27 LCD.12 | length 2622.3
  Top Layer w10: IDC.27 1713,3283 v1(1713,4161)
  Bottom Layer w10: v1(1713,4161) 2811,4161 LCD.12
NetIDC_28: IDC.28 LCD.14 | length 2948.3
  Bottom Layer w10: IDC.28 1464.41,3134.41 1464.41,3220.59 1440,3245 1395,3245 1305.59,3334.41 1305.59,4140.59 1400,4235 2526.65,4235 2558,4266.35 2816.35,4266.35 LCD.14
NetIDC_29: IDC.29 LCD.16 | length 3051.2
  Top Layer w10: v1(1930,3163) 2040,3163 2083,3206 v1(2083,4297)
  Bottom Layer w10: IDC.29 1484.41,3154.41 1484.41,3090.41 1449,3055 1420,3055 1385,3020 1385,2970 1400,2955 1568,2955 1776,3163 v1(1930,3163) ; v1(2083,4297) 2747,4297 LCD.16
NetIDC_30: IDC.30 LCD.18 | length 2651.6
  Bottom Layer w10: IDC.30 1380,3195 1285.59,3289.41 1285.59,4153.59 1399,4267 1851,4267 1921,4337 2687,4337 LCD.18
NetIDC_31: IDC.31 LCD.20 | length 2165.8
  Top Layer w10: IDC.31 1673,3443 1673,4366 v1(1675.03,4368.03)
  Bottom Layer w10: v1(1675.03,4368.03) 2618.03,4368.03 LCD.20
NetIDC_32: IDC.32 LCD.22 | length 2379.4
  Top Layer w10: v1(2580,4208) LCD.22
  Bottom Layer w10: IDC.32 1385.05,3295 1325.59,3354.46 1325.59,3594.41 1345,3613.82 1345,4100 1400,4155 1564,4155 1617,4208 v1(2580,4208)
NetIDC_33: IDC.33 LCD.24 | length 3331.3
  Top Layer w10: IDC.33 1485.59,3355.59 1485.59,2559.41 1490.59,2554.41 1809.7,2554.41 2480,3224.71 LCD.24
NetIDC_34: IDC.34 LCD.26 | length 1965.4
  Top Layer w10: v1(2380,4036) LCD.26
  Bottom Layer w10: IDC.34 1365.59,3454.41 1365.59,3554.41 1385,3573.82 1385,3720 1420,3755 1450,3755 1465,3770 1465,3920 1490,3945 1736,3945 1775,3984 2328,3984 v1(2380,4036)
NetIDC_35: IDC.35 LCD.28 | length 2194.6
  Top Layer w10: IDC.35 1591,3561 1591,4453 1918,4780 2280,4780 2322,4738 2322,4472 LCD.28
NetIDC_36: IDC.36 LCD.30 | length 2090.8
  Top Layer w10: v1(1879,3415) 1879,4391 1968,4480 2001.97,4480 2021.97,4500 2021.97,4540 2053.97,4572 2200,4572 2230,4542 2230,4480 LCD.30
  Bottom Layer w10: IDC.36 1465,3535 1759,3535 v1(1879,3415)
NetIDC_37: IDC.37 LCD.32 | length 1381.4
  Top Layer w10: IDC.37 1485.59,3634.41 1485.59,4258 v1(1534.59,4307)
  Bottom Layer w10: v1(1534.59,4307) 1659.59,4432 1908,4432 1951.97,4388.03 2038.03,4388.03 LCD.32
NetIDC_38: IDC.38 LCD.34 | length 1861.9
  Top Layer w10: v1(1904,3321) 1980,3397 LCD.34
  Bottom Layer w10: IDC.38 1425,3559.41 1385.59,3520 1385.59,3470 1400,3455.59 1769.41,3455.59 v1(1904,3321)
NetIDC_41: IDC.41 J1.05 J1.06 | length 5409.6
  Bottom Layer w10: IDC.41 1650,3795 1818.5,3963.5 2387.99,3963.5 2429.49,4005 5294,4005 6109,4820 J1.06 6460,4820 J1.05
NetIDC_42: IDC.42 J1.03 J1.04 | length 6041.7
  Bottom Layer w10: IDC.42 1385,3835 1385,4020 1400.59,4035.59 1695.41,4035.59 1725,4006 1798.26,4006 1870.26,4078 4028,4078 4823,4873 6522,4873 6555,4840 6555,4765 J1.03 J1.04
NetIDC_43: IDC.43 J1.01 J1.02 | length 5631.1
  Bottom Layer w10: IDC.43 1485,3855 1485,3770 1500,3755 1708,3755 1855,3902 5792,3902 J1.01 J1.02
pads on no net: IDC.44 IDC.45 IDC.46 IDC.47 IDC.48 IDC.49 IDC.50